# Altium PCB Boost-to-12V_test.PcbDoc
Units mm, origin at the board's own origin, x right, y up, seen from the top; angles counter-clockwise.
Board outline 17.4 x 14.48 mm, 2 copper layers (Top Layer, Bottom Layer); 14 components, 7 nets, 31 pads, 26 vias.
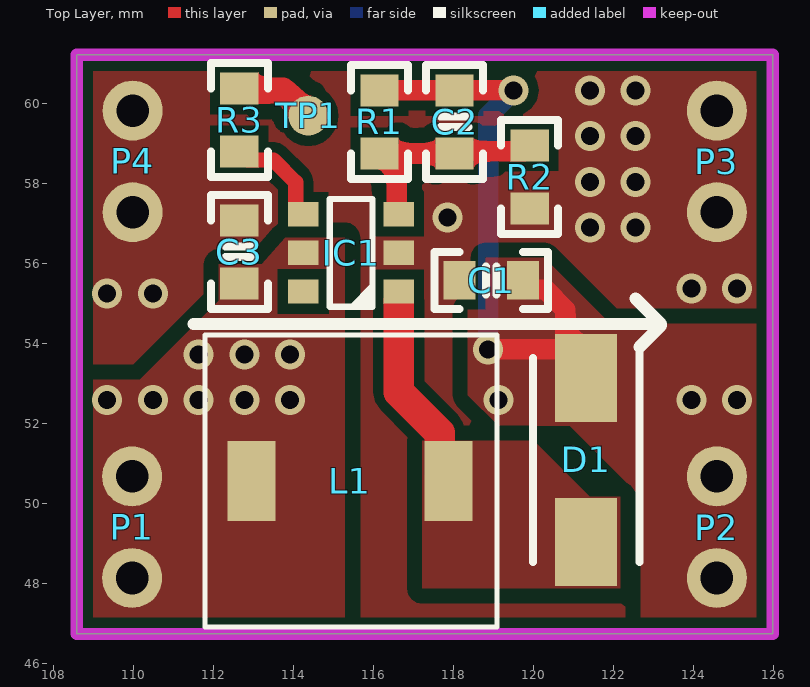
[diagram p0: Top Layer view]
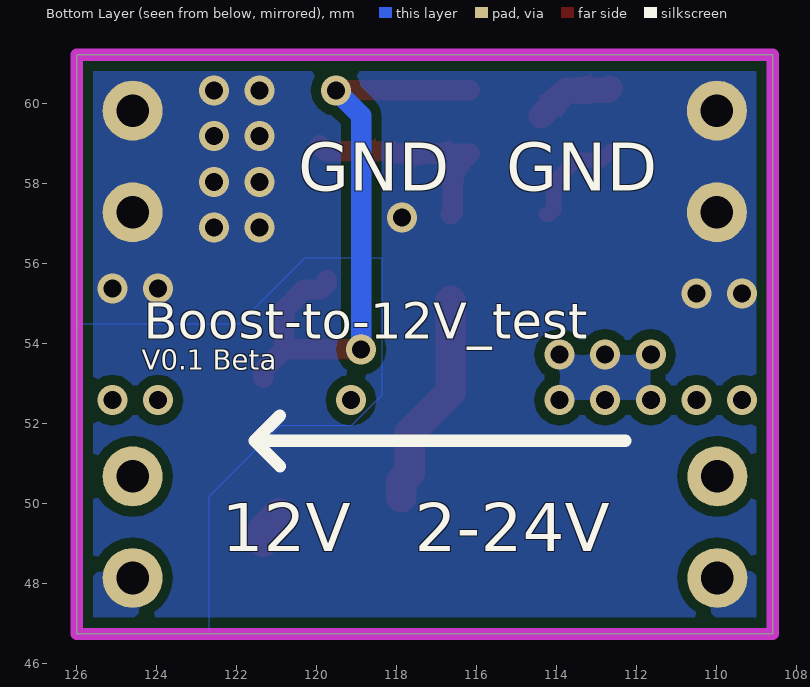
[diagram p1: Bottom Layer view, seen from below]
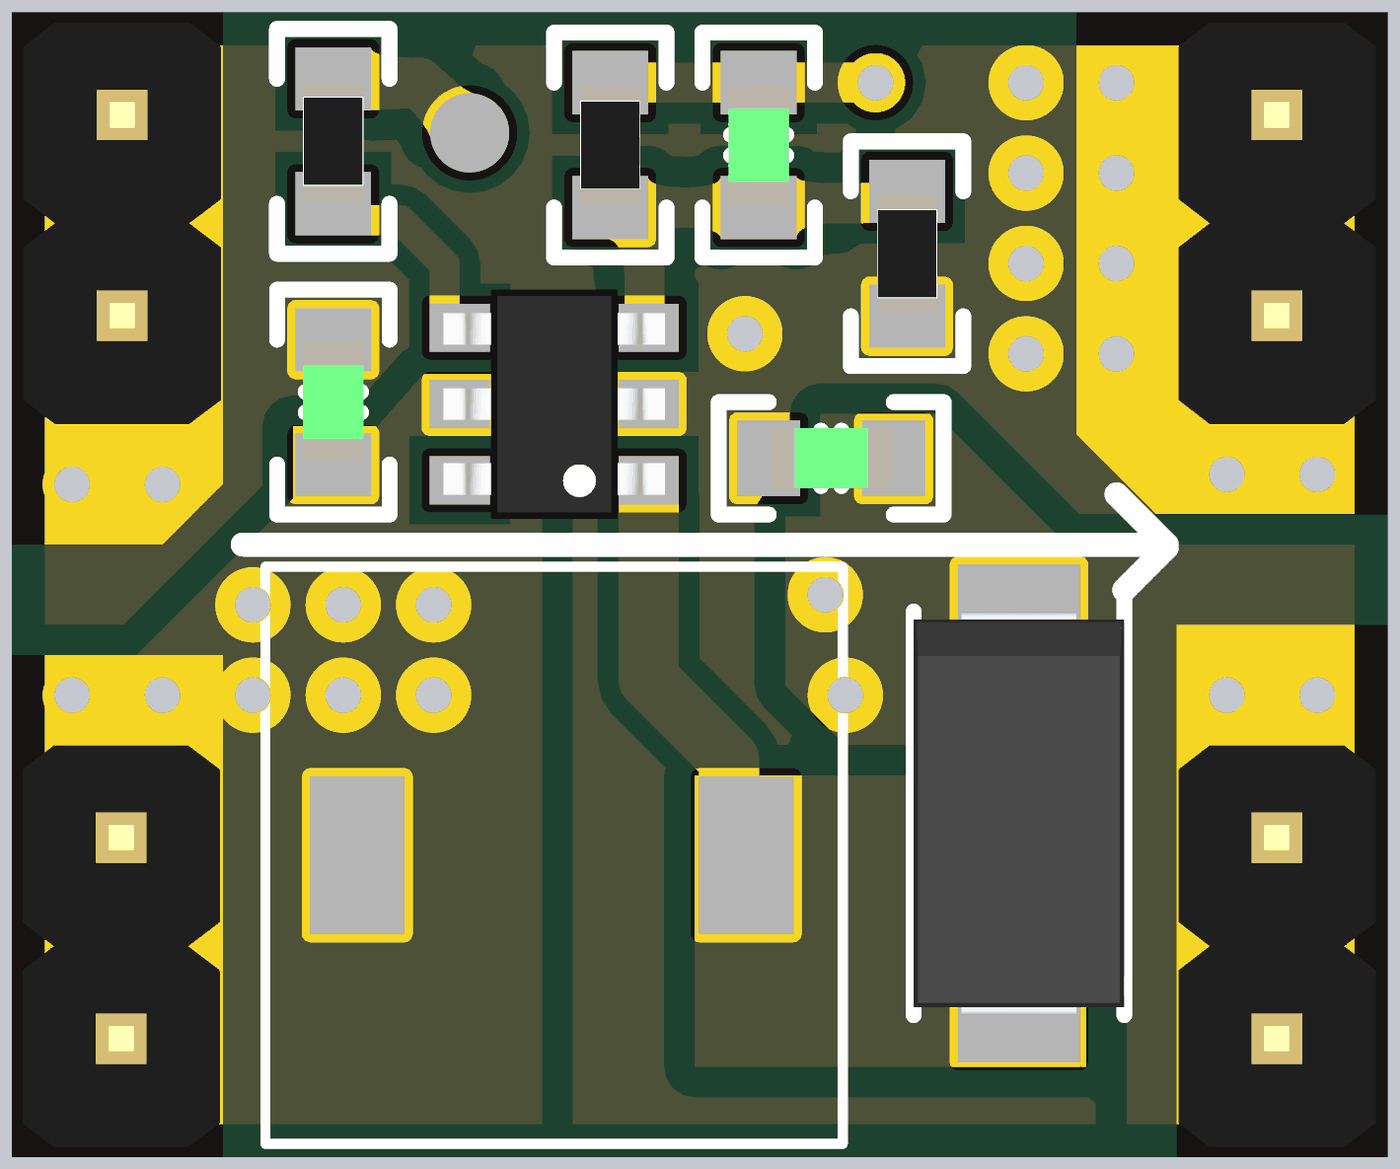
[diagram p2: 3D render of the assembled board from above, using the file's embedded part models]

## Layer stack, top to bottom
Top Solder: solder mask 0.0102, Solder Resist, Dk 3.5
Top Layer: signal copper 0.0356
Dielectric 1: dielectric 0.32, FR-4, Dk 4.8
Bottom Layer: signal copper 0.0356
Bottom Solder: solder mask 0.0102, Solder Resist, Dk 3.5

## Board outline
108.585,46.736 125.984,46.736 125.984,61.214 108.585,61.214

## Design rules (kind name [scope] priority, off if disabled: settings)
Clearance [All] p1: gap=0.254 ignorepadtopadclearanceinfootprint=FALSE except(0.381: Fill-Fill Fill-Poly Fill-Region Poly-Poly Poly-Region Region-Region)
PlaneConnect [All] p1: planeconnectstyle=Direct reliefexpansion=0.508 reliefentries=4 reliefconductorwidth=0.254 reliefairgap=0.254
PolygonConnect [All] p1: connectstyle=Direct reliefconductorwidth=0.254 reliefentries=4 polygonreliefangle="90 Angle" airgapwidth=0.254
RoutingVias [All] p1: holewidth=0.45 width=0.75 viastyle="Through Hole" minholewidth=0.45 minwidth=0.75 maxholewidth=0.45 maxwidth=0.75
SolderMaskExpansion [All] p1: expansion=0.102 istentingtop=FALSE
Width [All] p1: maxlimit=2.54 minlimit=0.381 preferedwidth=0.381
29 further rules are at their usual default settings.

## Components (designator, comment, footprint, x,y, rotation, side; value= is the part's Value field where it differs from the comment)
C1 "22uF/25V" CAP-0603 118.947,55.574 r0 top
C2 "15pF/50V" CAP-0603 118.03,59.536 r90 top
C3 "22uF/25V" CAP-0603 112.65,56.285 r270 top
D1 "SS34" DO-214AC_SMA 121.322,51.083 r270 top
IC1 "SX1308" SOT-23-6 115.443,56.261 r0 top locked
L1 "4.7uH/4A" SMD_7.3x7.3x4.2mm 114.973,50.183 r0 top
P1 "HDR1x2_2.54" HDR1X2_2.54_180 109.968,50.673 r0 top
P2 "HDR1x2_2.54" HDR1X2_2.54_180 124.587,50.673 r0 top
P3 "HDR1x2_2.54" HDR1X2_2.54_180 124.587,59.817 r0 top
P4 "HDR1x2_2.54" HDR1X2_2.54_180 109.982,59.817 r0 top
R1 "191k" R-0603 116.153,59.536 r90 top
R2 "10k" R-0603 119.906,58.161 r90 top
R3 "100k" R-0603 112.649,59.584 r270 top
TP1 "TestPoint" TestPoint 114.375,59.69 r90 top

## Footprints (in the part's own frame and the unit in brackets; to place one, negate y for a bottom-side part, rotate by r counter-clockwise, add the part's x,y. Pads: shape width x height; smd on the part's side, far side on the other; paste and mask are expansions set on the pad)
CAP-0603 [mm]
  rect 0.8x0.96 smd: 1(-0.79,0) 2(0.79,0)
  silkscreen extent -1.42,-0.71 1.42,0.71, body extent -0.76,-0.39 0.76,0.39, height 0.9
DO-214AC_SMA [mm]
  rect 2.2x1.55 smd: 1(2.05,0) 2(-2.05,0)
  silkscreen extent -2.83,-1.33 2.55,1.33, body extent -2.55,-1.33 2.55,1.33, height 2.29
HDR1X2_2.54_180 [mm]
  round 1.5 hole 0.813: 1(0,0) 2(0,-2.54)
  body extent -1.25,-3.81 1.25,1.27, height 8.2
R-0603 [mm]
  rect 0.8x0.96 smd: 1(-0.79,0) 2(0.79,0)
  silkscreen extent -1.42,-0.71 1.42,0.71, body extent -0.76,-0.38 0.76,0.38, height 0.41
SMD_7.3x7.3x4.2mm [mm]
  rect 1.2x2 smd: 1(-2.02,0.37) 2(2.9,0.37)
  silkscreen extent -3.18,-3.28 4.12,4.02, body extent -3.18,-3.28 4.1,4, height 3
SOT-23-6 [mil]
  rect 30x24 smd: 1(47,-38) 2(47,0) 3(47,38) 4(-47,38) 5(-47,0) 6(-47,-38)
  silkscreen extent -21,-53 21,53, body extent -55,-57 55,57, height 57
TestPoint [mm]
  round 1 smd: 1(0,0)

## Part data
C1 C3: library part CAP, "X7R", Package=0402, SuppliersPartNumber=C52923, ComponentLink1Description=供应商链接, ComponentLink1URL=http://www.szlcsc.com/product/details_53938.html, Supplier=LC
C2: library part CAP, "NPO", Package=0402, SuppliersPartNumber=C52923, ComponentLink1Description=供应商链接, ComponentLink1URL=http://www.szlcsc.com/product/details_53938.html, Supplier=LC
D1: library part DIODE, "肖特基二极管", Package=SMA(DO-214AC), SuppliersPartNumber=C22452, ComponentLink1Description=供应商链接, ComponentLink1URL=http://www.szlcsc.com/product/details_23178.html, Supplier=LC
IC1: "集成升压芯片", Manufacturer_Name="Shenzhen Suosemi Tech", Datasheet Link=https://datasheet.lcsc.com/szlcsc/Shenzhen-Suosemi-Tech-SX1308_C78162.pdf, Height=1.45mm, Manufacturer_Part_Number=SX1308
L1: library part INDUCTOR, "电感", Package=0402, SuppliersPartNumber=C32041, ComponentLink1Description=供应商链接, ComponentLink1URL=http://www.szlcsc.com/product/details_33003.html, Supplier=LC
P1 P2 P3 P4: "Header"
R1 R2 R3: library part RES, "贴片电阻", Package=0805, SuppliersPartNumber=C17798, Supplier=LC
TP1: "测试点"

## Via types
v1: diameter 0.75, hole 0.45, Top Layer to Bottom Layer, 26 vias

## Nets (pads, with @x,y where several pads share a name; then routed paths per layer and width w, separated by ;. In a path a pad name is that pad's centre, name@x,y a point inside that pad or via, vN(x,y) a via of type N, cw(c..) or ccw(c..) an arc to the next point about the centre after c; other vN are vias at no path point)
5V: C3.2 IC1.5 L1.1 P1.1 P1.2
  other v1: 109.347,52.578 110.49,52.578 111.633,52.578 112.776,52.578 113.919,52.578 111.633,53.721 112.776,53.721 113.919,53.721
12V: C1.2 C2.2 D1.2 P2.1 P2.2 R1.2 | length 15.4
  Top Layer w0.508: R1.2 C2.2 ; C2.2@118.03,60.326 v1(119.507,60.325) ; v1(118.872,53.848) D1.2@120.801,53.848 ; C1.2 119.737,55.494 119.883,55.348 120.293,55.348 120.801,54.84 D1.2@120.801,53.848 ; D1.2 121.322,53.327 D1.2@120.801,53.848
  Bottom Layer w0.508: v1(118.872,53.848) 118.872,59.69 v1(119.507,60.325)
  other v1: 119.126,52.578 123.952,52.578 125.095,52.578
EN: R3.1 TP1.1 | length 2
  Top Layer w0.635: R3.1 112.698,60.325 113.74,60.325 TP1.1
GND: C1.1 C3.1 IC1.2 P3.1 P3.2 P4.1 P4.2 R2.1
  other v1: 109.347,55.245 110.49,55.245 123.952,55.372 125.095,55.372 121.412,56.896 122.555,56.896 117.856,57.15 121.412,58.039 122.555,58.039 121.412,59.182 122.555,59.182 121.412,60.325 122.555,60.325
NetC2_1: C2.1 IC1.3 R1.1 R2.2 | length 5.9
  Top Layer w0.508: R1.1@116.586,58.6 116.586,57.277 IC1.3 ; 116.713,58.547 116.66,58.6 116.299,58.6 R1.1 116.233,58.746 C2.1 118.084,58.801 119.326,58.801 119.331,58.805 119.76,58.805 R2.2
NetD1_1: D1.1 IC1.1 L1.2 | length 6.3
  Top Layer w0.762: IC1.1@116.637,55.067 116.637,52.781 117.654,51.764 117.654,50.772 L1.2 L1.2@117.873,50.153 ; D1.1@120.928,49.752 121.322,49.358 D1.1
NetIC1_4: IC1.4 R3.2 | length 2.7
  Top Layer w0.381: R3.2 112.859,58.584 113.501,58.584 114.059,58.026 114.059,57.34 114.173,57.226 IC1.4
pads on no net: IC1.6

## Polygon pours and split planes (outlines as drawn)
12V on Top Layer "12V_L01_P002" (solid, remove dead copper, pour order 2): 125.984,46.736 125.984,54.483 121.92,54.483 120.269,56.134 118.364,56.134 118.364,52.705 119.126,51.943 120.904,51.943 122.682,50.165 122.682,46.736
GND on Top Layer "GND_L01_P003" (solid, remove dead copper, pour order 3): 106.586,61.29 128.27,61.29 128.27,46.812 106.586,46.812
5V on Top Layer "5V_L01_P001" (solid, remove dead copper, pour order 1): 113.792,56.642 113.208,55.982 112.141,55.982 112.141,55.067 110.16,53.086 108.61,53.086 108.61,46.761 115.291,46.761 115.291,56.642
NetD1_1 on Top Layer "NETD1_1_L01_P000" (solid, pour order 0): 122.174,50.165 122.174,47.879 117.221,47.879 117.221,51.562 120.015,51.562 121.412,50.165
5V on Bottom Layer "5V_L02_P007" (solid, remove dead copper, pour order 7): 113.792,56.642 113.208,55.982 112.141,55.982 112.141,55.067 110.16,53.086 108.61,53.086 108.61,46.761 115.291,46.761 115.291,56.642
12V on Bottom Layer "12V_L02_P006" (solid, remove dead copper, pour order 6): 125.984,46.736 125.984,54.483 121.92,54.483 120.269,56.134 118.364,56.134 118.364,52.705 119.126,51.943 120.904,51.943 122.682,50.165 122.682,46.736
no net on Bottom Layer "NONET_L02_P005" (solid, remove dead copper, pour order 5): 125.984,46.736 125.984,54.483 121.92,54.483 120.269,56.134 118.364,56.134 118.364,52.705 119.126,51.943 120.904,51.943 122.682,50.165 122.682,46.736
GND on Bottom Layer "GND_L02_P004" (solid, remove dead copper, pour order 4): 106.586,61.257 128.43,61.257 128.43,46.779 106.586,46.779
5V on Top Solder "NONET_L01_P-001" (solid): 108.585,46.736 111.252,46.736 111.252,53.086 108.585,53.086
GND on Top Solder "NONET_L01_P-001" (solid): 108.585,61.214 108.585,54.483 110.49,54.483 111.252,55.245 111.252,61.214
GND on Top Solder "NONET_L01_P-001" (solid): 125.984,61.214 122.047,61.214 122.047,55.88 123.063,54.864 125.984,54.864
12V on Top Solder "NONET_L01_P-001" (solid): 123.317,46.736 125.984,46.736 125.984,53.467 123.317,53.467

## Keep-outs
Keep-Out Layer:
  the board outline again, w0.305

## Silkscreen, mask and mechanical layers (free items; w line width, h text height)
Top Overlay:
  lines w0.305: 111.506,54.483 123.19,54.483 ; 122.555,55.118 123.19,54.483 ; 122.654,53.908 123.19,54.444 123.19,54.483
Bottom Overlay:
  lines w0.305: 112.268,51.562 121.539,51.562 ; 120.904,50.927 121.539,51.562 ; 120.904,52.197 121.539,51.562
  text "GND" at 115.243,57.82 h1.2
  text "GND" at 120.45,57.82 h1.2
  text "Boost-to-12V_test" at 124.31,54.108 h0.9
  text "V0.1 Beta" at 124.36,53.344 h0.5
  text "2-24V" at 117.529,48.803 h1.2
  text "12V" at 122.355,48.803 h1.2
Mechanical 1:
  the board outline again, w0.305